# Altium PCB GUVB-C31SM_BB.PcbDoc
Units mil, origin at the board's own origin, x right, y up, seen from the top; angles counter-clockwise.
Board outline 1410 x 995 mil, 2 copper layers (Top Layer, Bottom Layer); 8 components, 4 nets, 14 pads, 0 vias.
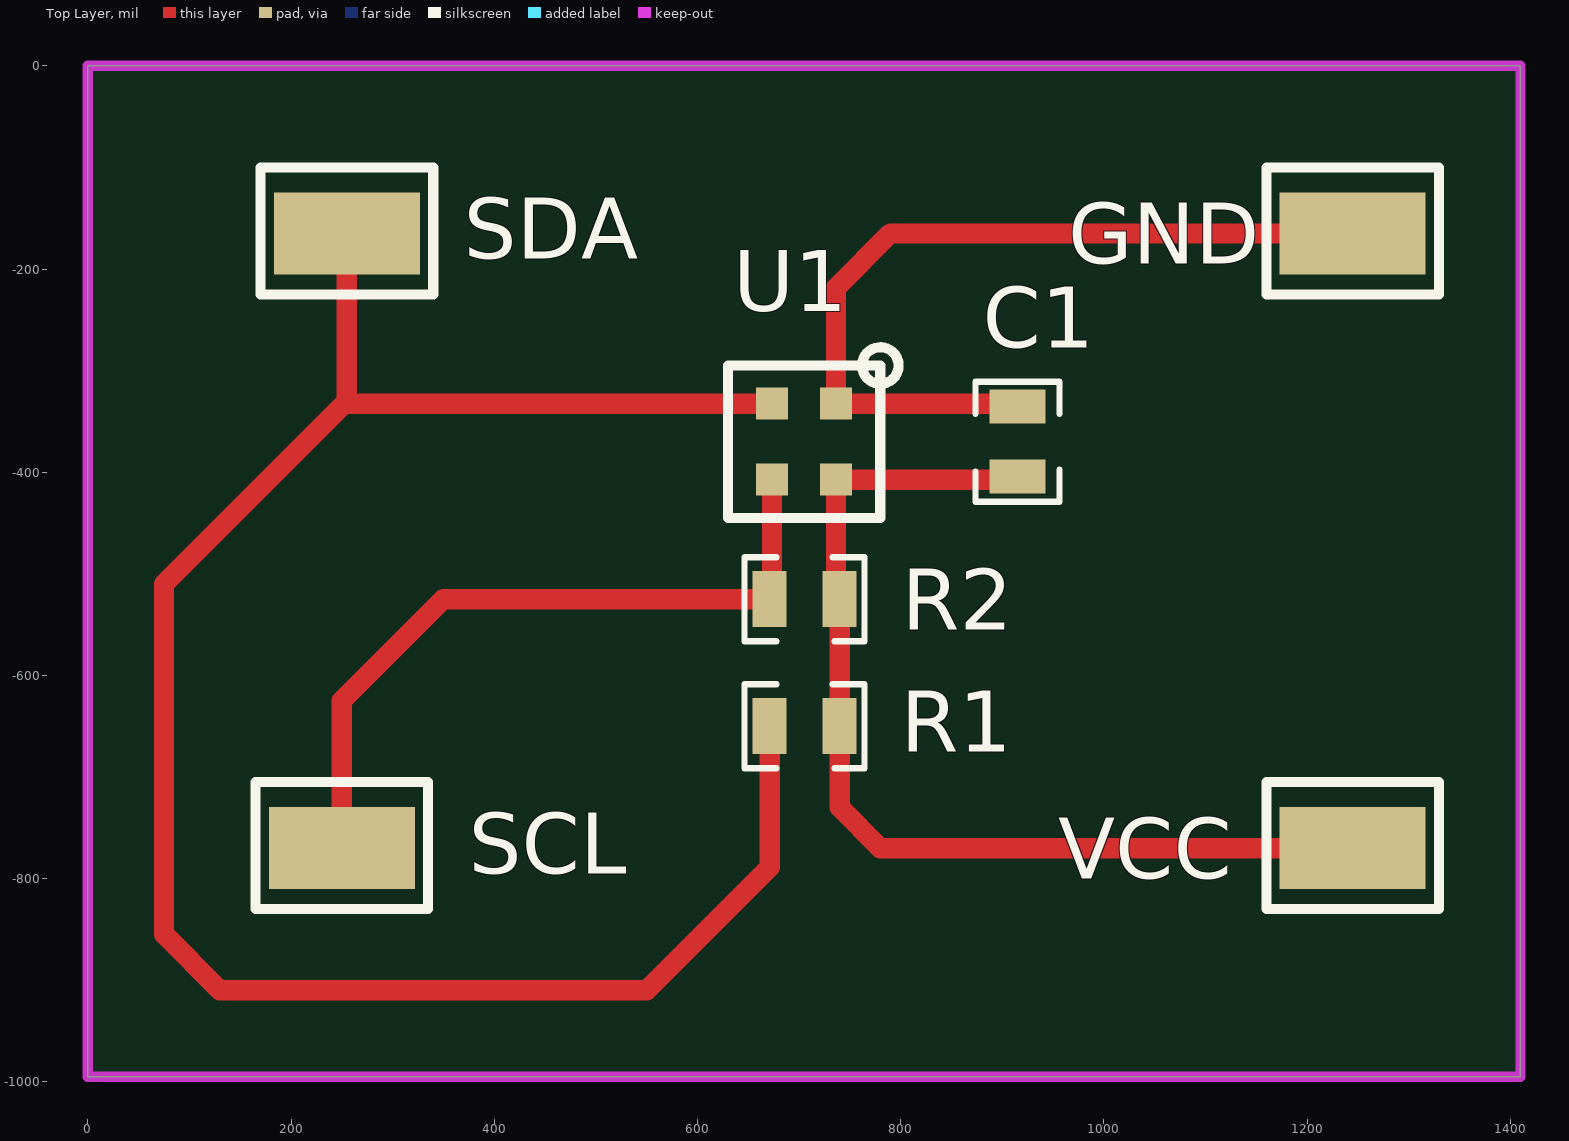
[diagram p0: Top Layer view]
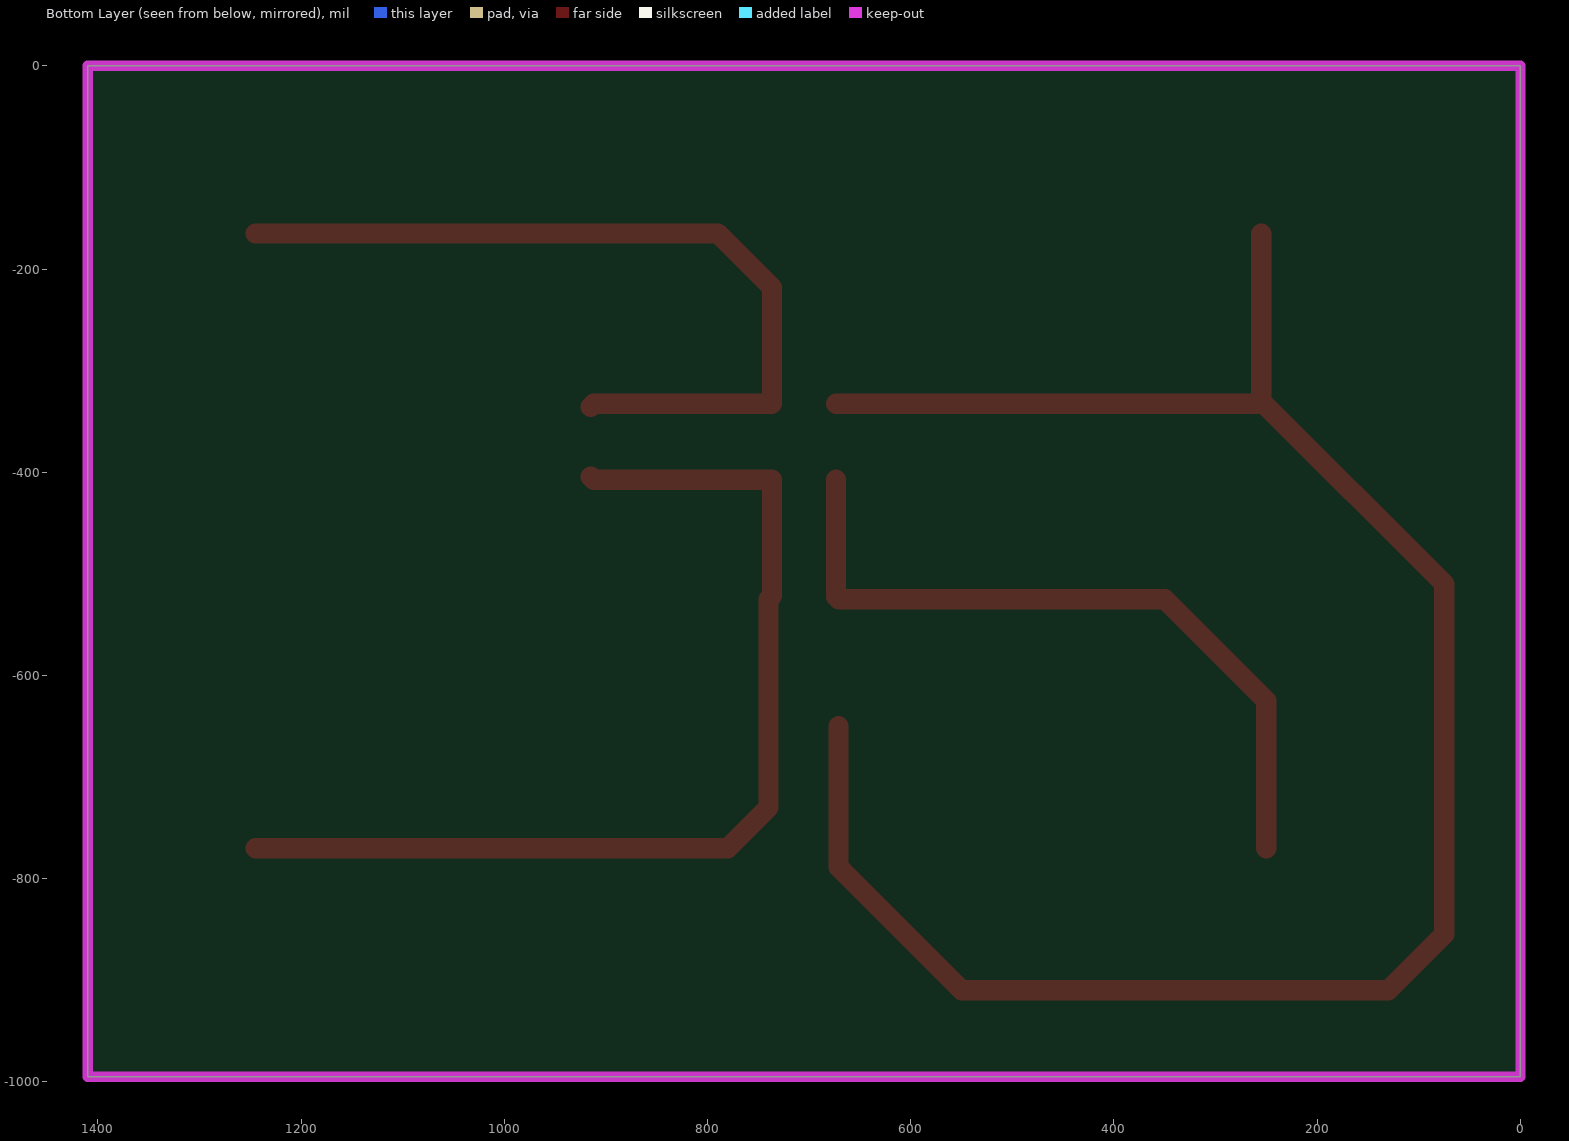
[diagram p1: Bottom Layer view, seen from below]
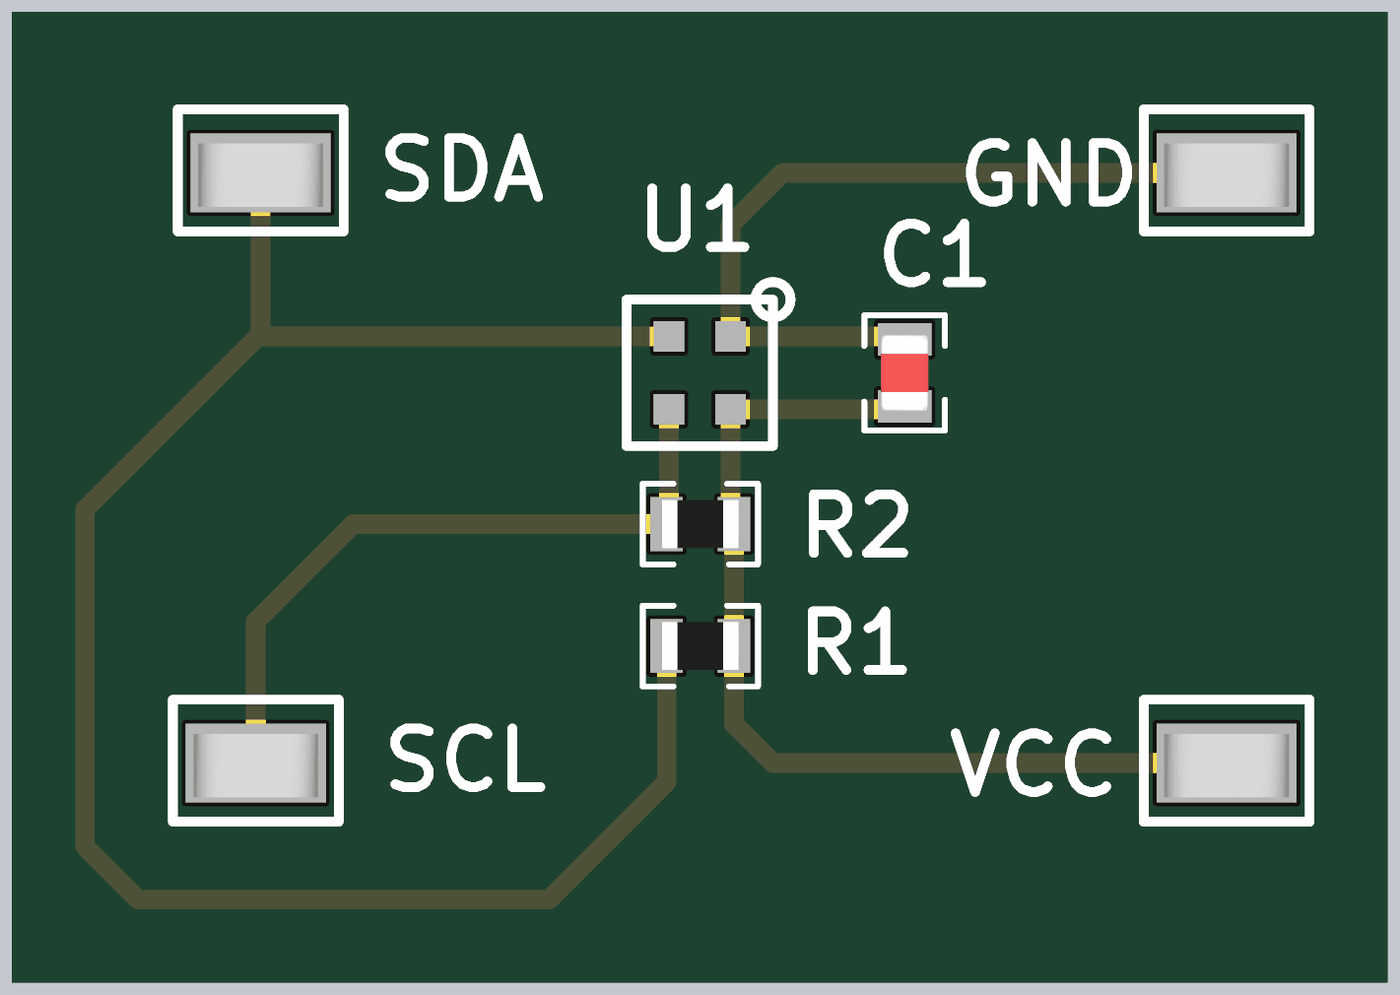
[diagram p2: 3D render of the assembled board from above, using the file's embedded part models]

## Layer stack, top to bottom
Top Solder: solder mask 0.4, Solder Resist, Dk 3.5
Top Layer: signal copper 1.4
Dielectric 1: dielectric 12.6, FR-4, Dk 4.8
Bottom Layer: signal copper 1.4
Bottom Solder: solder mask 0.4, Solder Resist, Dk 3.5

## Board outline
0,-995 1410,-995 1410,0 0,0

## Design rules (kind name [scope] priority, off if disabled: settings)
Clearance [All] p1: gap=10 ignorepadtopadclearanceinfootprint=FALSE except(0: Arc-Hole Track-Hole SMDPad-Hole THPad-Hole Via-Hole Fill-Hole Poly-Hole Region-Hole Text-Hole)
PolygonConnect [All] p1: connectstyle=Relief reliefconductorwidth=10 reliefentries=4 polygonreliefangle="90 Angle" airgapwidth=10
RoutingVias [All] p1: holewidth=28 width=50 viastyle="Through Hole" minholewidth=28 minwidth=50 maxholewidth=28 maxwidth=50
SolderMaskExpansion [All] p1: expansion=4
Width [All] p1: maxlimit=20 minlimit=10 preferedwidth=10
30 further rules are at their usual default settings.

## Components (designator, comment, footprint, x,y, rotation, side; value= is the part's Value field where it differs from the comment)
C1 "1uF" CAP-0805(2012)-R 915,-370 r270 top
GND "S1751-46R" S1751-46R 1245,-165 r0 top
R1 "4.7k" R-0805(2012)-R 705.55,-650 r0 top
R2 "4.7k" R-0805(2012)-R 705.55,-525 r0 top
SCL "S1751-46R" S1751-46R 250,-770 r0 top
SDA "S1751-46R" S1751-46R 255,-165 r0 top
U1 "GUVB-C31SM" GUVB-C31SM 705,-370 r0 top
VCC "S1751-46R" S1751-46R 1245,-770 r0 top

## Footprints (in the part's own frame and the unit in brackets; to place one, negate y for a bottom-side part, rotate by r counter-clockwise, add the part's x,y. Pads: shape width x height; smd on the part's side, far side on the other; paste and mask are expansions set on the pad)
CAP-0805(2012)-R [mm] "Capacitor 0805(2012) Reflow"
  rect 0.85x1.4 smd: 1(-0.875,0) 2(0.875,0)
  silkscreen extent -1.5,-1.05 1.5,1.05, body extent -1,-0.63 1,0.63, height 0.78
GUVB-C31SM [mm]
  rect 0.8x0.8 smd: 1(0.8,0.95) 2(-0.8,0.95) 3(-0.8,-0.95) 4(0.8,-0.95)
  silkscreen extent -1.91,-1.91 2.36,2.36
R-0805(2012)-R [mm] "Resistor 0805(2012) Reflow"
  rect 0.85x1.4 smd: 1(-0.875,0) 2(0.875,0)
  silkscreen extent -1.5,-1.05 1.5,1.05, body extent -1,-0.62 1,0.63, height 0.5
S1751-46R [mm] "PC TEST POINT TIN SMD"
  rect 3.65x2.05 smd: 1(0,0)
  silkscreen extent -2.16,-1.52 2.16,1.65, body extent -1.62,-0.89 1.62,0.76, height 2.05

## Part data
C1: library part C-0805(2012), "___ OHM ___ mW 0805(2012) SMD"
GND SCL SDA VCC: "PC TEST POINT TIN SMD", Color=Natural, Manufacturer="Harwin Inc.", Supplier Part Number 1=952-1478-1-ND, Category="Test and Measurement", ComponentLink1Description=http://cdn.harwin.com/pdfs/S1751.pdf, ComponentLink1URL=http://cdn.harwin.com/pdfs/S1751.pdf, Manufacturer Part Number=S1751-46R, Material="Copper Alloy", Mounting Type="Surface Mount", Packaging="Cut Tape (CT)", Pricing 1="1=0.29, 10=0.272, 25=0.2324, 50=0.2032, 100=0.1888, 250=0.167, 500=0.15972, 1000=0.13068 (USD)", RoHS="RoHS Compliant", Stock 1=275112, Supplier 1=Digi-Key, Terminal="0.128\" x 0.065\" x 0.079\" (3.25mm x 1.65mm x 2.00mm) Brass, Tin Plated", Type="PC Test Point"
R1 R2: library part R-0805(2012), "___ OHM ___ mW 0805(2012) SMD"

## Nets (pads, with @x,y where several pads share a name; then routed paths per layer and width w, separated by ;. In a path a pad name is that pad's centre, name@x,y a point inside that pad or via, vN(x,y) a via of type N, cw(c..) or ccw(c..) an arc to the next point about the centre after c; other vN are vias at no path point)
GND: C1.1 GND.1 U1.1 | length 824.5
  Top Layer w20: C1.1 912.05,-332.6 U1.1 736.5,-218.5 790,-165 GND.1
NetC1_2: C1.2 R1.2 R2.2 U1.4 VCC.1 | length 1025.3
  Top Layer w20: C1.2 912.05,-407.4 U1.4 736.5,-521.5 R2.2 R1.2 740,-730 780,-770 VCC.1
NetR1_1: R1.1 SDA.1 U1.2 | length 1991
  Top Layer w20: 255,-332.6 U1.2 ; SDA.1 255,-330 75,-510 75,-855 130,-910 550,-910 671.1,-788.9 R1.1
NetR2_1: R2.1 SCL.1 U1.3 | length 726.1
  Top Layer w20: SCL.1 250,-625 350,-525 R2.1 673.5,-522.6 U1.3

## Keep-outs
Keep-Out Layer:
  the board outline again, w10

## Silkscreen, mask and mechanical layers (free items; w line width, h text height)
Mechanical 3:
  the board outline again, w10